# Altium PCB PCB1.PcbDoc
Units mm, origin at the board's own origin, x right, y up, seen from the top; angles counter-clockwise.
Board outline 152.4 x 101.6 mm, 3 copper layers (Top Layer, outline, Bottom Layer), stack 0.488 mm thick; 65 components, 56 nets, 223 pads, 0 vias.
Unrouted connection lines stored in the file: 8.
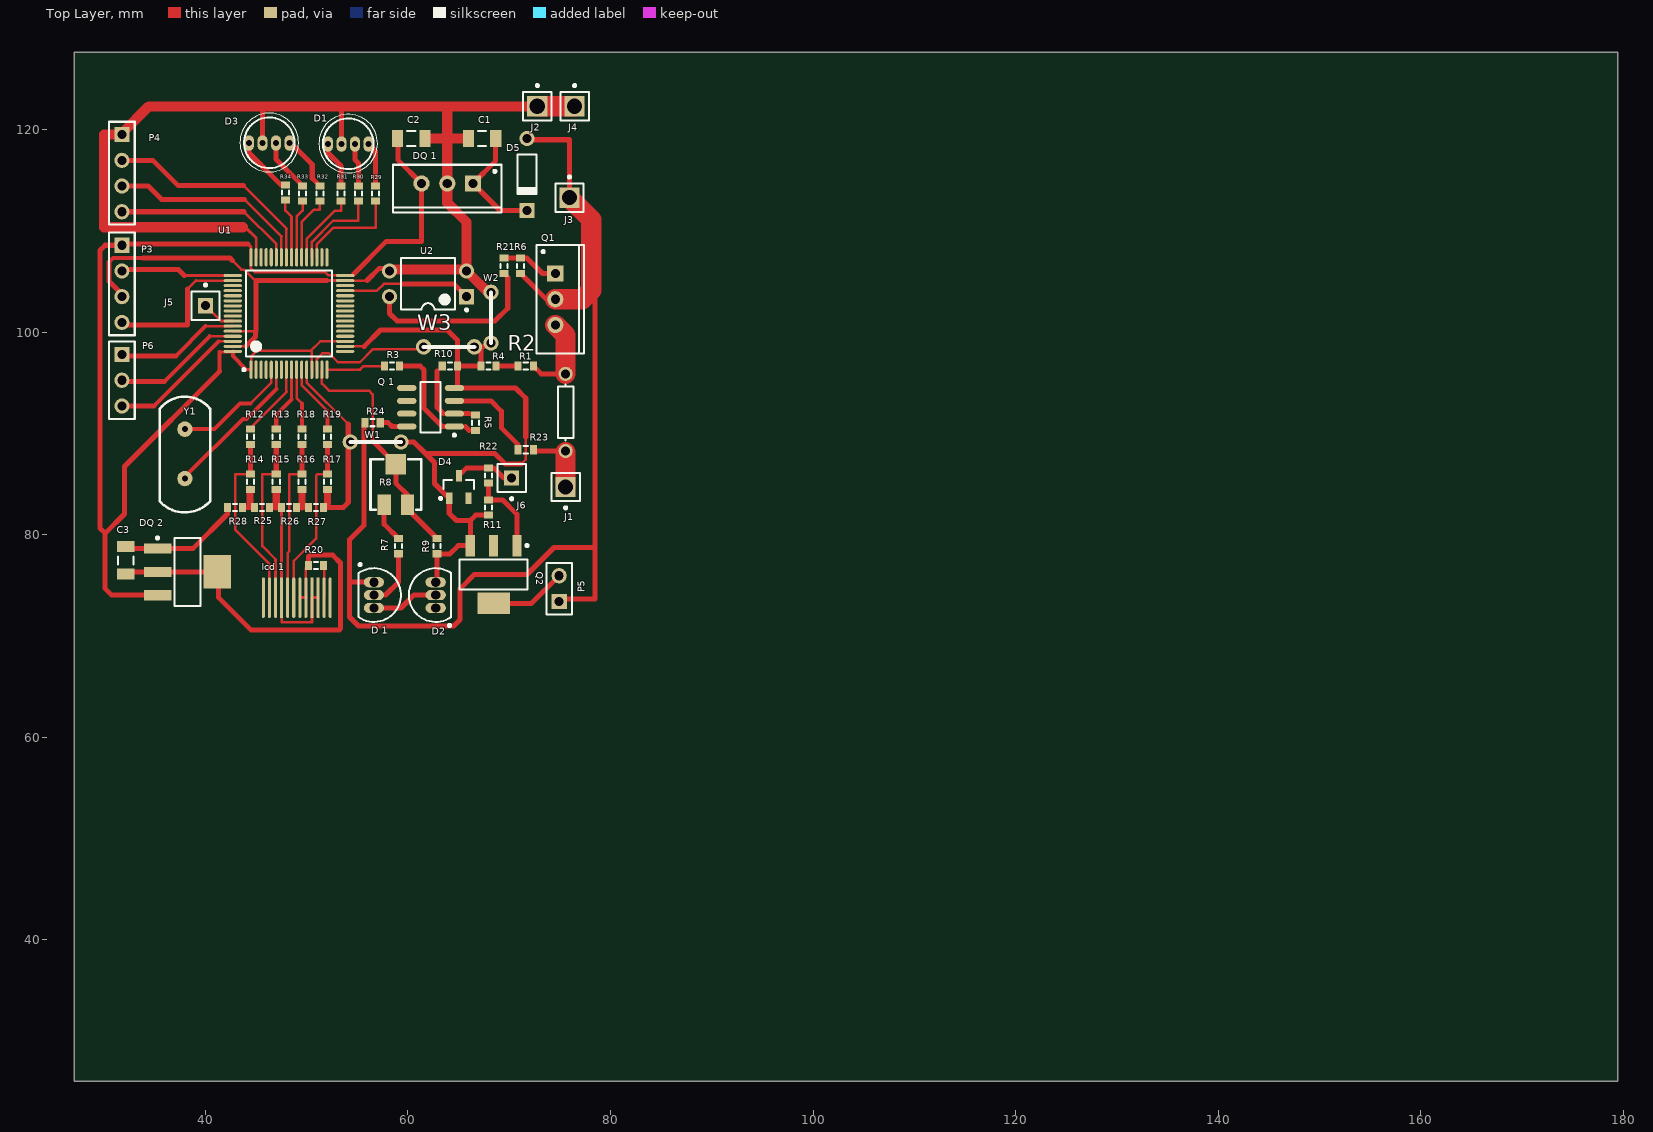
[diagram p0: Top Layer view]
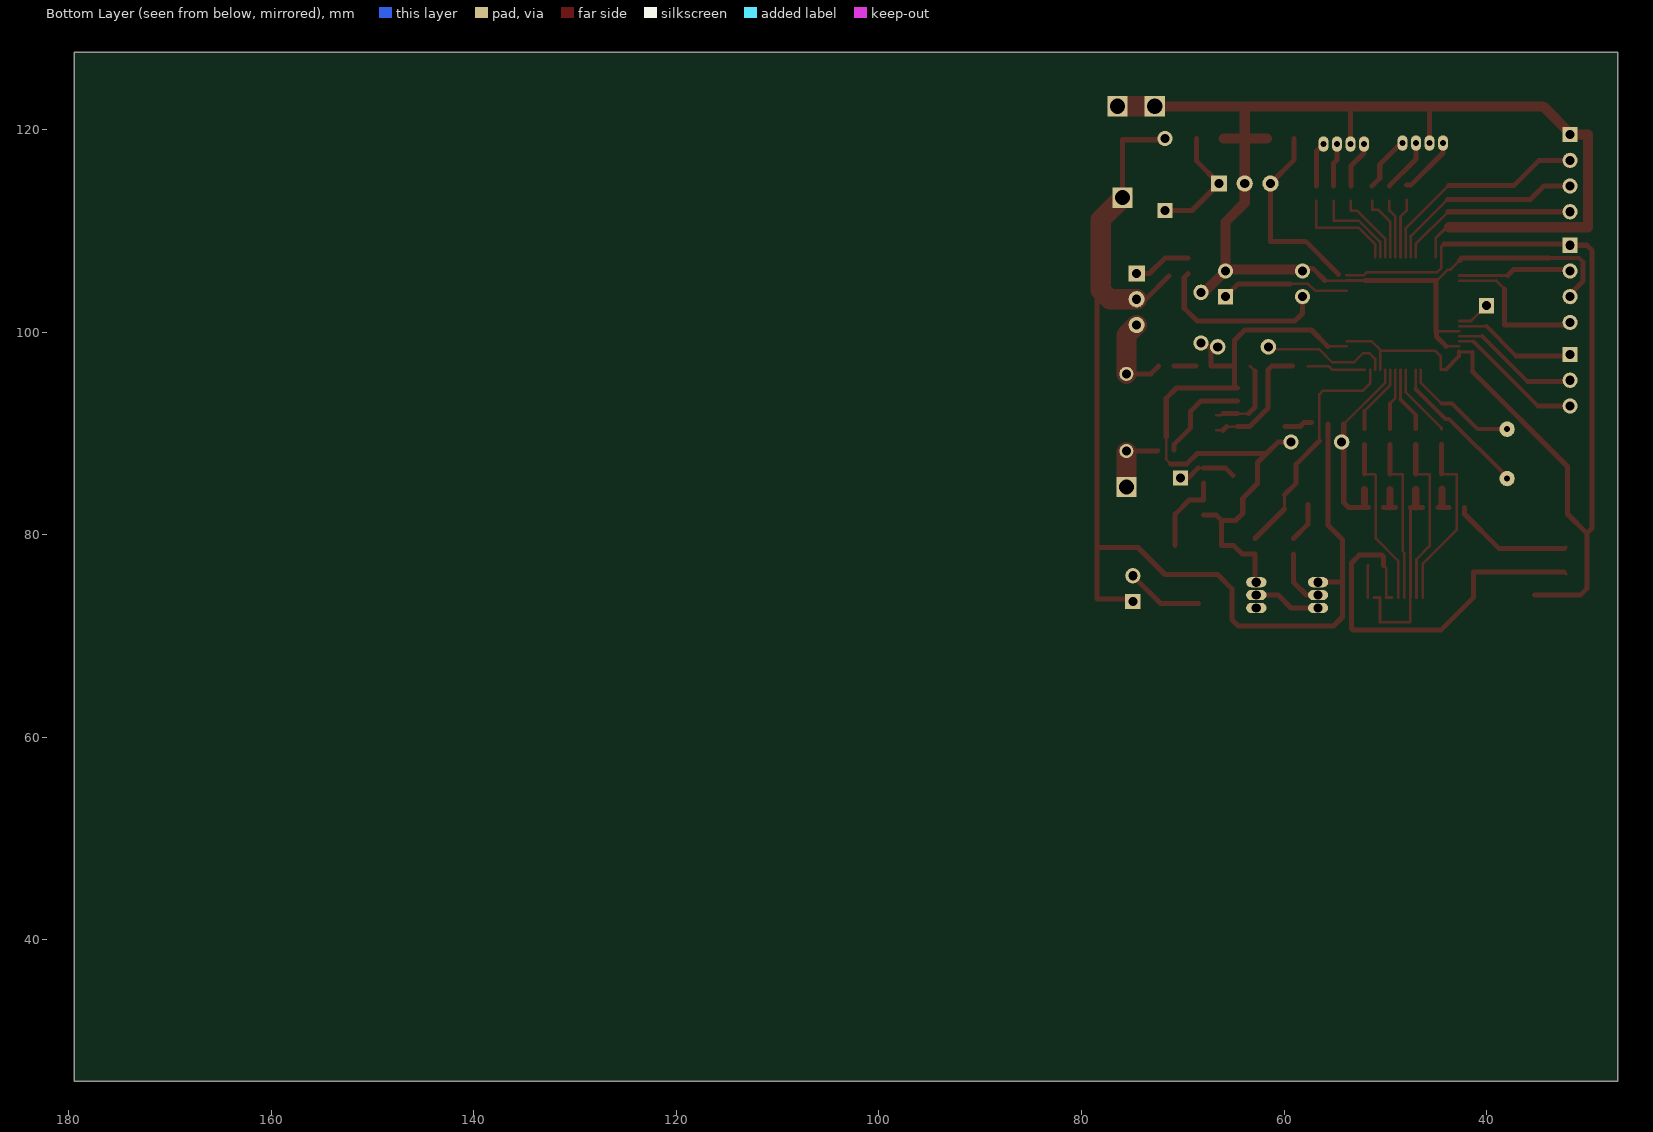
[diagram p1: Bottom Layer view, seen from below]

## Layer stack, top to bottom
Top Solder: solder mask 0.0102, Solder Resist, Dk 3.5
Top Layer: signal copper 0.0356
Dielectric 1: core 0.254, FR-4, Dk 4.2
outline: signal copper 0.036
Dielectric 2: prepreg 0.127, Dk 4.2
Bottom Layer: signal copper 0.0356
Bottom Solder: solder mask 0.0102, Solder Resist, Dk 3.5

## Board outline
27.051,26.035 179.451,26.035 179.451,127.635 27.051,127.635

## Design rules (kind name [scope] priority, off if disabled: settings)
Clearance [All] p1: gap=0.254
PolygonConnect [All] p1: connectstyle=Relief reliefconductorwidth=0.254 reliefentries=4 polygonreliefangle="90 Angle" airgapwidth=0.254
RoomDefinition "V_A meter" [InComponentClass('V_A meter')] p1: confinementstyle=ConfineIn formatcopy=TRUE lockcomponents=FALSE outline 0,0 50.8,0 50.8,25.4 0,25.4
RoomDefinition MK [InComponentClass('MK')] p2: confinementstyle=ConfineIn formatcopy=TRUE lockcomponents=FALSE outline 0,0 50.8,0 50.8,25.4 0,25.4
RoomDefinition display [InComponentClass('display')] p3: confinementstyle=ConfineIn formatcopy=TRUE lockcomponents=FALSE outline 0,0 50.8,0 50.8,25.4 0,25.4
RoomDefinition Designator [InComponentClass('Designator')] p4: confinementstyle=ConfineIn formatcopy=TRUE lockcomponents=FALSE outline 0,0 50.8,0 50.8,25.4 0,25.4
RoomDefinition 3 [InComponentClass('3')] p5: confinementstyle=ConfineIn formatcopy=TRUE lockcomponents=FALSE outline 0,0 50.8,0 50.8,25.4 0,25.4
RoomDefinition 2 [InComponentClass('2')] p6: confinementstyle=ConfineIn formatcopy=TRUE lockcomponents=FALSE outline 0,0 50.8,0 50.8,25.4 0,25.4
RoutingVias [All] p1: holewidth=0.711 width=1.27 viastyle="Through Hole" minholewidth=0.711 minwidth=1.27 maxholewidth=0.711 maxwidth=1.27
SolderMaskExpansion [All] p1: expansion=0.102
Width [All] p1: maxlimit=0.254 minlimit=0.254 preferedwidth=0.254
29 further rules are at their usual default settings.

## Classes and differential pairs
component class Designator: D4 P5 Q2 R11 R22 W1
component class 2: Q1 R6 R21 U2 W2
component class 3: D2 "D 1" R7 R8 R9
component class MK: C1 C2 D1 D3 D5 "DQ 1" J1 J2 J3 J4 J5 J6 P3 P4 P6 R29 R30 R31 R32 R33 R34 W3 Y1
component class display: C3 "DQ 2" "lcd 1" R12 R13 R14 R15 R16 R17 R18 R19 R20 R25 R26 R27 R28
component class "V_A meter": "Q 1" R1 R2 R3 R4 R5 R10 R23 R24

## Components (designator, comment, footprint, x,y, rotation, side; value= is the part's Value field where it differs from the comment)
C1 "Cap Semi" C1206 67.31,119.126 r180 top
C2 "Cap Semi" C1206 60.325,119.126 r180 top
C3 "Cap Semi" C1206 32.131,77.47 r90 top
D1 "LED1" PCBComponent_1#1 52.1,118.6 r0 top
D2 "LM335" TO-226-AE 62.738,74.041 r0 top
D3 "LED1" PCBComponent_1#1 44.3,118.7 r0 top
D4 "BZX84-C5V1" SOT-23_N 65.024,84.709 r90 top
D5 "Diode 1N4448" DO-35 71.755,115.57 r270 top
"D 1" "LM334" TO-226-AE 56.642,74.041 r180 top
"DQ 1" "lm7805" TO-220AB 63.881,114.681 r180 top
"DQ 2" "lm117" sot223_m 38.227,76.327 r0 top
J1 "Socket" PIN1#1 75.565,84.709 r180 top
J2 "Socket" PIN1#1 72.771,122.301 r0 top
J3 "Socket" PIN1#1 75.946,113.284 r0 top
J4 "Socket" PIN1#1 76.454,122.301 r0 top
J5 "Socket" PIN1#2 40.005,102.616 r0 top
J6 "Socket" PIN1#2 70.231,85.598 r180 top
"lcd 1" "Component_1" LCD 45.72,73.787 r0 top
P3 "PROG" HDR1X4 31.75,108.585 r270 top
P4 "NKODER" HDR1X4 31.75,119.507 r270 top
P5 "Header 2" HDR1X2 74.93,73.406 r90 top
P6 "Header 3" HDR1X3 31.75,97.79 r270 top
Q1 "MOSFET-P" TO-220AB 74.549,103.251 r270 top
Q2 "IRFL4105" sot223_l 68.453,76.073 r270 top
"Q 1" "LM258" SO8_L 62.23,92.583 r180 top
R1 "Res3" J1-0603 71.628,96.647 r0 top
R2 "Res1" AXIAL-0.3 75.565,92.075 r90 top
R3 "Res3" J1-0603 58.42,96.647 r180 top
R4 "Res3" J1-0603 67.945,96.647 r180 top
R5 "Res3" J1-0603 66.675,91.059 r270 top
R6 "Res3" J1-0603 71.12,106.553 r270 top
R7 "Res3" J1-0603 59.055,78.867 r90 top
R8 "RPot SM" POT4MM-2 58.801,84.963 r90 top
R9 "Res3" J1-0603 62.865,78.867 r270 top
R10 "Res3" J1-0603 64.135,96.647 r180 top
R11 "Res3" J1-0603 67.945,82.677 r90 top
R12 "Res3" J1-0603 44.45,89.674 r90 top
R13 "Res3" J1-0603 46.99,89.674 r90 top
R14 "Res3" J1-0603 44.45,85.229 r270 top
R15 "Res3" J1-0603 46.99,85.229 r270 top
R16 "Res3" J1-0603 49.53,85.229 r270 top
R17 "Res3" J1-0603 52.07,85.229 r270 top
R18 "Res3" J1-0603 49.53,89.674 r270 top
R19 "Res3" J1-0603 52.07,89.674 r270 top
R20 "Res3" J1-0603 50.927,76.962 r180 top
R21 "Res3" J1-0603 69.469,106.553 r270 top
R22 "Res3" J1-0603 67.945,85.852 r270 top
R23 "Res3" J1-0603 71.628,88.392 r180 top
R24 "Res3" J1-0603 56.515,91.059 r0 top
R25 "Res3" J1-0603 45.593,82.689 r0 top
R26 "Res3" J1-0603 48.26,82.689 r180 top
R27 "Res3" J1-0603 50.927,82.689 r180 top
R28 "Res3" J1-0603 42.926,82.677 r180 top
R29 "Res3" J1-0603 56.8,113.7 r90 top
R30 "Res3" J1-0603 55.1,113.7 r90 top
R31 "Res3" J1-0603 53.4,113.7 r90 top
R32 "Res3" J1-0603 51.3,113.7 r90 top
R33 "Res3" J1-0603 49.6,113.7 r90 top
R34 "Res3" J1-0603 47.9,113.8 r90 top
U1 "STM32F100R6T6" STM-LQFP64_N 48.25,101.845 r90 top
U2 "Optoisolator1" DIP-4 61.976,104.775 r180 top
W1 "Jumper" PCBComponent_1#2 59.309,89.154 r180 top
W2 "Jumper" PCBComponent_1#2 68.199,98.933 r90 top
W3 "Jumper" PCBComponent_1#2 66.548,98.552 r180 top
Y1 "XTAL" PCBComponent_1#3 37.973,90.424 r270 top

## Footprints (in the part's own frame and the unit in brackets; to place one, negate y for a bottom-side part, rotate by r counter-clockwise, add the part's x,y. Pads: shape width x height; smd on the part's side, far side on the other; paste and mask are expansions set on the pad)
AXIAL-0.3 [mm] "Axial Device, Thru-Hole; 2 Leads; 0.3 in Pin Spacing"
  round 1.4 hole 0.9: 1(-3.81,0) 2(3.81,0)
  silkscreen extent -2.77,-0.76 2.77,0.76
C1206 [mm] "Chip Capacitor, Body 3.2x1.6mm, IPC High Density"
  rect 1.1x1.7 smd: 1(-1.35,0) 2(1.35,0)
  silkscreen extent -0.4,-0.75 0.4,0.75, body extent -1.7,-0.9 1.7,0.9, height 1.3
DIP-4 [mm] "DIP; 4 Leads; Row Spacing 7.62 mm; Pitch 2.54 mm"
  rect 1.5x1.5 hole 0.9: 1(-3.81,1.27)
  round 1.5 hole 0.9: 2(-3.81,-1.27) 3(3.81,-1.27) 4(3.81,1.27)
  silkscreen extent -3.94,-2.55 2.65,2.69, body extent -3.15,-2.5 3.15,2.5, height 5.6
DO-35 [mm] "Diode, Axial; Body 3.8 x 1.9 mm (LxDia. max), Lead Dia. 0.53 mm (max)"
  round 1.5 hole 0.9: 1(-3.55,0)
  rect 1.5x1.5 hole 0.9: 2(3.55,0)
  silkscreen extent -1.95,-0.95 2.05,0.95
HDR1X2 [mm] "Connector; Header; 2 Position"
  rect 1.5x1.5 hole 0.9: 1(0,0)
  round 1.5 hole 0.9: 2(2.54,0)
  silkscreen extent -1.27,-1.27 3.81,1.27
HDR1X3 [mm] "Connector; Header; 3 Position"
  rect 1.5x1.5 hole 0.9: 1(0,0)
  round 1.5 hole 0.9: 2(2.54,0) 3(5.08,0)
  silkscreen extent -1.27,-1.27 6.35,1.27
HDR1X4 [mm] "Connector; Header; 4 Position"
  rect 1.5x1.5 hole 0.9: 1(0,0)
  round 1.5 hole 0.9: 2(2.54,0) 3(5.08,0) 4(7.62,0)
  silkscreen extent -1.27,-1.27 8.89,1.27
J1-0603 [mm] "Chip Resistor, Body 1.6x0.8mm, IPC High Density"
  rect 0.7x0.9 smd: 1(-0.75,0) 2(0.75,0)
  silkscreen extent -0.2,-0.35 0.2,0.35, body extent -0.85,-0.48 0.85,0.48, height 0.9
LCD [mm]
  oval 0.3x4 smd: A1(0,0) A2(0.6,0) A3(1.2,0) A5(2.4,0) A6(3,0) A7(3.6,0) A8(4.2,0) A11(6,0) A12(6.6,0)
  rect 0.3x4 smd: A4(1.8,0) A9(4.8,0)
  rrect50% 0.3x4 smd: A10(5.4,0)
PCBComponent_1#1 [mm]
  oval 1x1.524 hole 0.6: 1(0,-0.025) 2(1.333,-0.025) 3(2.667,-0.025) 4(4,-0.025)
  silkscreen extent -0.9,-2.87 4.9,2.92
PCBComponent_1#2 [mm]
  round 1.524 hole 0.9: 1(0,0) 2(5,0)
  silkscreen extent 0,0 5,0
PCBComponent_1#3 [mm]
  round 1.524 hole 0.6: 1(0,0) 2(4.88,0)
  silkscreen extent -3.2,-2.5 8.23,2.5
PIN1#1 [mm] "Connector; Plug"
  rect 2x2 hole 1.5: 1(0,0)
  silkscreen extent -1.4,-1.4 1.4,2.17
PIN1#2 [mm] "Connector; Plug"
  rect 1.5x1.5 hole 0.9: 1(0,0)
  silkscreen extent -1.4,-1.4 1.4,2.17
POT4MM-2 [mm] "Square Trimming Potentiometer"
  rect 2x1.3 smd: CCW(-2,-1.15) CW(-2,1.15)
  rect 2x2 smd: W(2,0)
  silkscreen extent -2.5,-2.5 2.5,2.5
SO8_L [mm] "SOIC, 8-Leads, Body 4.9x3.9mm, Pitch 1.27mm, IPC High Density"
  oval 1.9x0.6 smd: 1(-2.35,1.905) 2(-2.35,0.635) 3(-2.35,-0.635) 4(-2.35,-1.905) 5(2.35,-1.905) 6(2.35,-0.635) 7(2.35,0.635) 8(2.35,1.905)
  silkscreen extent -2.48,-2.5 1,2.88, body extent -2,-2.5 2,2.5, height 1.75
sot223_l [mm] "SOT223, 4-Leads, Body 6.5x3.5mm, Pitch 2.3mm, Lead Span 7mm, IPC High Density"
  rect 2.1x0.9 smd: 1(-2.85,2.3) 2(-2.85,0) 3(-2.85,-2.3)
  rect 2.1x3.2 smd: 4(2.85,0)
  silkscreen extent -2.97,-3.35 1.5,3.43, body extent -1.85,-3.35 1.85,3.35, height 1.7
sot223_m [mm] "SOT223, 4-Leads, Body 6.5x3.5mm, Pitch 2.3mm, Lead Span 7mm, IPC Low Density"
  rect 2.7x1 smd: 1(-2.95,2.3) 2(-2.95,0) 3(-2.95,-2.3)
  rect 2.7x3.3 smd: 4(2.95,0)
  silkscreen extent -3.07,-3.35 1.3,3.47, body extent -1.85,-3.35 1.85,3.35, height 1.7
SOT-23_N [mm] "SOT23, 3-Leads, Body 2.9x1.3mm, Pitch 0.95mm, Lead Span 2.5mm, IPC Medium Density"
  rect 1.15x0.6 smd: 1(-1.125,0.95) 2(-1.125,-0.95) 3(1.125,0)
  silkscreen extent -1.25,-1.5 0.7,1.92, body extent -0.7,-1.5 0.7,1.5, height 1.1
STM-LQFP64_N [mm] "Thin QFP, 64-Leads, Body 10x10mm, Pitch 0.5mm, IPC Medium Density"
  oval 1.8x0.3 smd: 1(-5.55,3.75) 2(-5.55,3.25) 3(-5.55,2.75) 4(-5.55,2.25) 5(-5.55,1.75) 6(-5.55,1.25) 7(-5.55,0.75) 8(-5.55,0.25) 9(-5.55,-0.25) 10(-5.55,-0.75) 11(-5.55,-1.25) 12(-5.55,-1.75) 13(-5.55,-2.25) 14(-5.55,-2.75) 15(-5.55,-3.25) 16(-5.55,-3.75) 33(5.55,-3.75) 34(5.55,-3.25) 35(5.55,-2.75) 36(5.55,-2.25) 37(5.55,-1.75) 38(5.55,-1.25) 39(5.55,-0.75) 40(5.55,-0.25) 41(5.55,0.25) 42(5.55,0.75) 43(5.55,1.25) 44(5.55,1.75) 45(5.55,2.25) 46(5.55,2.75) 47(5.55,3.25) 48(5.55,3.75)
  oval 0.3x1.8 smd: 17(-3.75,-5.55) 18(-3.25,-5.55) 19(-2.75,-5.55) 20(-2.25,-5.55) 21(-1.75,-5.55) 22(-1.25,-5.55) 23(-0.75,-5.55) 24(-0.25,-5.55) 25(0.25,-5.55) 26(0.75,-5.55) 27(1.25,-5.55) 28(1.75,-5.55) 29(2.25,-5.55) 30(2.75,-5.55) 31(3.25,-5.55) 32(3.75,-5.55) 49(3.75,5.55) 50(3.25,5.55) 51(2.75,5.55) 52(2.25,5.55) 53(1.75,5.55) 54(1.25,5.55) 55(0.75,5.55) 56(0.25,5.55) 57(-0.25,5.55) 58(-0.75,5.55) 59(-1.25,5.55) 60(-1.75,5.55) 61(-2.25,5.55) 62(-2.75,5.55) 63(-3.25,5.55) 64(-3.75,5.55)
  silkscreen extent -5.67,-4.25 4.25,4.57, body extent -5,-5 5,5, height 1.6
TO-220AB [mm] "TO, Thru-Hole, Vertical, Heatsink Mounted; 3 In-Line Leads; Pitch 2.54 mm"
  rect 1.6x1.6 hole 0.9: 1(-2.54,0)
  round 1.6 hole 0.9: 2(0,0) 3(2.54,0)
  silkscreen extent -5.35,-1.85 5.35,2.85, body extent -5.4,-1.9 5.4,2.9, height 19.3
TO-226-AE [mm] "TO, Flat Index; 3 In-Line, Axial Leads; Body Dia. 4.8mm; Leads 0.55 x 0.51 mm (max)"
  oval 2x1 hole 0.9: 1(0,-1.27) 2(0,0) 3(0,1.27)
  silkscreen extent -2.65,-3.13 1.52,2.65, body extent -2.66,-2.66 1.52,2.66, height 7.87

## Part data
C1 C2 C3: "Capacitor (Semiconductor SIM Model)"
D1 D3: "Typical RED GaAs LED"
D4: library part "Diode BAS70", "Silicon AF Schottky Diode for High-Speed Switching"
D5: "High Conductance Fast Diode"
P3 P4: library part "Header 4", "Header, 4-Pin"
P5: "Header, 2-Pin"
P6: "Header, 3-Pin"
Q1: "P-Channel MOSFET"
Q2: library part MOSFET-N4, "N-Channel MOSFET, Externally Terminated Substrate"
"Q 1": library part LM258d
R1 R2 R3 R4 R5 R6 R7 R9 R10 R11 R12 R13 R14 R15 R16 R17 R18 R19 R20 R21 R22 R23 R24 R25 R26 R27 R28 R29 R30 R31 R32 R33 R34: "Resistor"
R8: "Square Trimming Potentiometer"
U1: "ARM Cortex-M3 32-bit MCU, 32 KB Flash, 4 KB Internal RAM, 51 I/Os, 64-pin LQFP, -40 to 85 degC, Tray"
U2: "4-Pin Phototransistor Optocoupler"
W1 W2 W3: "Jumper Wire"
Y1: "Crystal Oscillator"

## Nets (pads, with @x,y where several pads share a name; then routed paths per layer and width w, separated by ;. In a path a pad name is that pad's centre, name@x,y a point inside that pad or via, vN(x,y) a via of type N, cw(c..) or ccw(c..) an arc to the next point about the centre after c; other vN are vias at no path point)
"AKB OUT": Q1.3 R1.2 R2.2 | length 8.7
  Top Layer w0.5: R1.2@72.39,96.647 73.152,95.885 R2.2
  Top Layer w2: Q1.3 75.565,99.695 R2.2
GND: "DQ 1.2" "DQ 2.1" "Q 1.2" "Q 1.4" C1.2 C2.1 C3.2 D1.2 D2.3 D3.2 D4.1 J2.1 J4.1 P3.3 P4.1 Q2.3 R4.2 R5.1 R9.2 R10.1 R10.2 R11.1 R17.2 R27.1 R28.2 U1.12 U1.18 U1.31 U1.47 U1.60 U1.63 U2.2 U2.3 W1.1 W1.2 W2.1 W2.2 | length 267.2
  Top Layer w0.254: P3.3 P3.3@31.75,103.759 ; C3.2 C3.2@32.324,78.627 ; 42.672,107.061 43.561,106.172 43.815,106.172 44.883,105.104 45.01,105.104 ; U1.63@42.71,98.604 43.994,98.604 ; U1.60@42.71,100.104 44.958,100.104 ; 43.688,110.363 43.942,110.363 ; 44.386,122.11 44.577,122.301 44.482,122.206 ; U1.47 45,109.285 45.01,109.295 ; 45.6,122.301 45.633,122.268 ; U1.12 50,95.034 54.102,90.932 ; R27.1 52.07,83.082 ; 52.018,105.104 U1.31@53.81,105.104 ; U1.18 55.671,98.595 ; U1.31 55.946,105.095 55.955,105.104 ; U2.3@57.912,106.299 U2.3@58.166,106.172 ; D2.3@62.738,75.438 D2.3@62.865,75.565 ; 62.865,96.139 R10.2@63.373,96.647 ; 63.5,91.948 64.58,91.948 ; 66.04,91.948 66.179,91.809 R5.1 ; W2.1@67.818,98.933 W2.1 W2.1@68.453,99.187 ; 71.209,86.995 71.628,87.414 71.628,89.662 ; J2.1@72.517,122.809 J2.1@72.771,122.555
  Top Layer w0.3: 43.942,110.363 45.01,109.295
  Top Layer w0.4: 30.48,106.934 30.861,107.315 33.846,107.315
  Top Layer w0.5: 30.48,106.934 30.48,105.029 P3.3@31.75,103.759 ; C3.2@32.324,78.627 35.277,78.627 38.749,78.627 42.176,82.054 R28.2 ; 33.846,107.315 42.418,107.315 42.672,107.061 ; 43.994,98.604 44.958,99.568 44.958,100.104 ; 45.01,100.076 45.01,105.104 52.018,105.104 ; D3.2 45.633,122.268 ; R27.1 53.606,82.689 54.102,83.185 54.102,90.932 ; D1.2 53.433,122.268 ; 55.68,98.604 57.279,100.203 63.881,100.203 64.885,99.199 R10.1 ; 55.955,105.104 57.15,106.299 U2.3@57.912,106.299 ; W1.1 60.579,89.154 61.722,88.011 ; D2.3@62.865,75.565 R9.2 64.147,78.117 64.953,78.923 Q2.3 66.153,81.393 ; 62.865,96.139 62.865,92.583 63.5,91.948 ; 64.58,91.948 66.04,91.948 ; 64.58,94.488 70.612,94.488 71.628,93.472 71.628,89.662 ; 64.885,94.793 R10.1 ; W2.1@67.818,98.933 67.195,98.31 R4.2 R10.1 ; R11.1 66.687,81.927 66.153,81.393 ; 71.209,86.995 69.596,86.995 68.58,88.011 61.722,88.011 ; 61.722,88.011 62.611,87.122 62.611,85.047 D4.1 64.074,82.103 64.784,81.393 66.153,81.393
  Top Layer w0.7: 52.07,83.082 R17.2
  Top Layer w1: P4.1@31.686,119.57 34.417,122.301 44.577,122.301 45.6,122.301 J2.1 ; P4.1 29.972,119.507 29.972,110.363 43.688,110.363 ; U2.3@58.166,106.172 65.786,106.172 65.786,110.871 63.881,112.776 63.881,114.681 63.881,119.126 ; C2.1 63.881,119.126 ; 63.881,122.174 63.881,119.126 ; U2.2 W2.2@68.199,103.632 ; C1.2 63.881,119.126
  Top Layer w2: J2.1 J4.1
"LED B 1": R31.1 U1.37 | length 7.3
  Top Layer w0.254: U1.37 50,109.2 52.8,112 53.4,112 R31.1
"LED B 2": R34.1 U1.40 | length 5.9
  Top Layer w0.254: R34.1 47.9,112 48.5,111.4 U1.40
"LED G 1": R30.1 U1.36 | length 8.9
  Top Layer w0.254: U1.36 50.5,108.9 52.6,111 55.1,111 R30.1
"LED G 2": R33.1 U1.39 | length 5.8
  Top Layer w0.254: U1.39 49,111.4 49.6,112 R33.1
"LED R 1": R29.1 U1.35 | length 10.4
  Top Layer w0.254: U1.35 U1.35@51,107.414 ; U1.35@51.01,107.404 U1.35@51,107.414 ; R29.1 56.8,110.3 52.6,110.3 51,108.7 U1.35@51,107.414
"LED R 2": R32.1 U1.38 | length 6.7
  Top Layer w0.254: U1.38 49.5,110.9 50.7,112.1 51.3,112.1 R32.1
NetC1_1: "DQ 1.1" C1.1 D5.2 | length 11.8
  Top Layer w0.5: C1.1 68.66,116.92 66.421,114.681 69.088,112.014 D5.2@71.749,112.014
NetC3_1: "DQ 2.2" "DQ 2.4" "lcd 1.A7" "lcd 1.A8" C3.1 R20.2 | length 39.9
  Top Layer w0.254: C3.1 C3.1@32.338,76.327 ; 49.92,73.787 49.92,76.705 R20.2 ; 53.213,70.612 53.34,70.739
  Top Layer w0.3: 49.32,73.787 49.92,73.787
  Top Layer w0.5: C3.1@32.338,76.327 35.277,76.327 41.177,76.327 ; 41.275,76.327 41.275,73.816 44.479,70.612 53.213,70.612 ; R20.2 50.177,77.839 50.316,77.978 52.578,77.978 53.34,77.216 53.34,70.739
NetD1_1: D1.1 R31.2 | length 4.7
  Top Layer w0.5: D1.1 52.1,117.7 53.4,116.4 R31.2
NetD1_3: D1.3 R30.2 | length 4.3
  Top Layer w0.5: D1.3 54.767,117.033 55.1,116.7 R30.2
NetD1_4: D1.4 R29.2 | length 4.4
  Top Layer w0.5: D1.4 56.8,117.875 R29.2
NetD3_1: D3.1 R34.2 | length 5.9
  Top Layer w0.5: D3.1 44.3,117.7 47.45,114.55 R34.2
NetD3_3: D3.3 R33.2 | length 5.3
  Top Layer w0.5: D3.3 46.967,117.083 R33.2
NetD3_4: D3.4 R32.2 | length 5.5
  Top Layer w0.5: D3.4 48.425,118.675 50.4,116.7 50.55,116.55 50.55,115.2 R32.2
NetD4_3: D4.3 J6.1 R22.1 | length 5.9
  Top Layer w0.254: R22.1 68.465,86.602
  Top Layer w0.5: D4.3 65.792,86.602 R22.1 ; 68.465,86.602 69.469,85.598 J6.1
"NetD 1_2": "D 1.2" R7.1 | length 5.7
  Top Layer w0.254: 56.642,74.041 57.785,74.041
  Top Layer w0.5: 57.785,74.041 59.055,75.311 R7.1
"NetD 1_3": "D 1.3" D2.2 | length 6.6
  Top Layer w0.5: 56.642,72.771 59.309,72.771 60.579,74.041 D2.2
NetJ1_1: J1.1 R2.1 R23.1 | length 6.7
  Top Layer w0.254: R23.1 R23.1@72.505,88.265
  Top Layer w0.5: R23.1@72.505,88.265 R2.1
  Top Layer w2: J1.1 R2.1@75.565,88.138
NetJ5_1: J5.1 U1.58 | length 3.9
  Top Layer w0.254: J5.1@39.751,103.124 39.751,102.87 41.517,101.104 U1.58@42.71,101.104
"Netlcd 1_A2": "lcd 1.A2" R12.1 R14.1 | length 18.1
  Top Layer w0.254: R14.1 42.926,85.979 42.926,80.518 46.32,77.124 46.32,73.787
  Top Layer w0.5: R14.1 R12.1
"Netlcd 1_A3": "lcd 1.A3" R13.1 R15.1 | length 17.1
  Top Layer w0.254: 46.92,73.787 46.92,77.578 45.612,78.886 45.612,85.979 R15.1
  Top Layer w0.5: R15.1 R13.1
"Netlcd 1_A4": "lcd 1.A4" "lcd 1.A9" "lcd 1.A10" R14.2 R15.2 R16.2 R25.1 R25.2 R26.1 R26.2 R27.2 R28.1 | length 26
  Top Layer w0.254: 47.51,73.797 R26.2 ; 47.52,73.787 47.52,71.348 50.52,71.348 50.52,73.787
  Top Layer w0.3: 50.52,73.787 51.12,73.787
  Top Layer w0.5: R28.1@43.688,82.689 R25.1@44.8,82.689 ; R25.2 R26.2 ; R15.2@46.925,84.414 R15.2 ; R26.1 49.53,82.689 ; R16.2 R16.2@49.6,84.409 ; 49.6,82.689 R27.2
  Top Layer w0.7: 44.4,82.875 R14.2@44.4,84.49 ; 46.99,82.754 R15.2 ; 49.53,82.759 R16.2
"Netlcd 1_A5": "lcd 1.A5" R16.1 R18.2 | length 16.5
  Top Layer w0.254: 48.12,73.787 48.12,78.195 48.275,78.35 48.275,85.979 R16.1 ; 48.275,83.943 48.279,83.947
  Top Layer w0.5: R16.1 R18.2
"Netlcd 1_A6": "lcd 1.A6" R17.1 R19.2 | length 17.1
  Top Layer w0.254: 48.72,73.787 48.72,77.422 50.927,79.629 50.927,85.852 51.054,85.979 R17.1
  Top Layer w0.5: R17.1 R19.2
"Netlcd 1_A11": "lcd 1.A11" R20.1 | length 3.2
  Top Layer w0.254: R20.1 51.72,76.919 51.72,73.787
NetP3_2: P3.2 U1.49 | length 11.2
  Top Layer w0.254: 37.915,105.595 U1.49
  Top Layer w0.5: P3.2@31.75,106.172 37.338,106.172 37.906,105.604
NetP3_4: P3.4 U1.50 | length 14.8
  Top Layer w0.254: 38.227,104.267 39.064,105.104 ; 39.073,105.095 U1.50
  Top Layer w0.5: P3.4@31.75,100.711 38.227,100.711 38.227,104.267
NetP4_2: P4.2 U1.41 | length 21.9
  Top Layer w0.254: 43.742,114.5 48.01,110.232 48,110.222 U1.41
  Top Layer w0.5: P4.2 34.808,116.967 37.275,114.5 43.742,114.5
NetP4_3: P4.3 U1.42 | length 19.9
  Top Layer w0.254: 43.872,113.1 47.51,109.462 47.5,109.452 U1.42
  Top Layer w0.5: P4.3 34.348,114.427 35.675,113.1 43.872,113.1
NetP4_4: P4.4 U1.43 | length 17.9
  Top Layer w0.254: 43.815,111.887 47.01,108.692 47,108.682 U1.43
  Top Layer w0.5: P4.4 43.815,111.887
NetP5_2: P5.2 Q2.2 Q2.4 | length 7.6
  Top Layer w0.5: Q2.4 72.207,73.223 P5.2
NetP6_1: P6.1 U1.59 | length 12.1
  Top Layer w0.254: P6.1@31.877,97.409 P6.1@32.131,97.663 ; 40.034,100.595 U1.59
  Top Layer w0.4: 37.084,97.663 40.025,100.604
  Top Layer w0.5: P6.1@32.131,97.663 37.084,97.663
NetP6_2: P6.2 U1.61 | length 12.8
  Top Layer w0.254: 40.413,99.595 U1.61 ; U1.61@42.707,99.601 U1.61@42.71,99.604
  Top Layer w0.4: 35.941,95.123 40.413,99.595
  Top Layer w0.5: P6.2@31.75,95.123 35.941,95.123
NetP6_3: P6.3 U1.62 | length 13.7
  Top Layer w0.254: P6.3@31.75,92.329 P6.3@32.131,92.71 ; 41.31,99.095 U1.62
  Top Layer w0.4: 34.925,92.71 41.275,99.06
  Top Layer w0.5: P6.3@32.131,92.71 34.925,92.71
NetQ1_1: Q1.1 R6.1 R21.1 | length 6.2
  Top Layer w0.254: R6.1 71.628,107.303
  Top Layer w0.5: R21.1 71.755,107.303 73.279,105.791 Q1.1
NetQ2_1: Q2.1 R11.2 R22.2 | length 8.2
  Top Layer w0.5: R22.2 R11.2 69.354,83.427 70.753,82.028 Q2.1
"NetQ 1_1": "Q 1.1" R3.1 R5.2 | length 12.4
  Top Layer w0.254: 64.58,90.678 65.659,90.678 ; 66.028,90.309 R5.2
  Top Layer w0.5: R3.1 61.214,96.647 61.595,96.266 61.595,92.456 63.373,90.678 64.58,90.678 ; 65.659,90.678 66.028,90.309
"NetQ 1_3": "Q 1.3" R23.2 | length 9.6
  Top Layer w0.5: 64.58,93.218 68.199,93.218 69.215,92.202 69.215,90.551 70.878,88.888 R23.2
"NetQ 1_8": "Q 1.8" R24.2 | length 2.8
  Top Layer w0.5: R24.2 58.039,91.059 58.42,90.678 59.88,90.678
NetR1_1: R1.1 R4.1 W3.1 | length 2.2
  Top Layer w0.5: R4.1 R1.1
NetR3_2: R3.2 U1.16 | length 5.8
  Top Layer w0.254: U1.16@52.041,96.304 55.283,96.304 55.626,96.647 R3.2
NetR7_2: R7.2 R8.CW | length 3.9
  Top Layer w0.5: R8.CW 57.651,81.021 R7.2
NetR8_CCW: R8.CCW R8.W R9.1 U1.15 | length 23.7
  Top Layer w0.254: U1.15 51.5,94.931 52.197,94.234 56.134,94.234 56.515,93.853 56.515,89.249 ; R8.CCW@59.951,82.531 R8.CCW R8.CCW@59.951,83.94
  Top Layer w0.5: 56.515,89.249 R8.W 58.801,85.09 R8.CCW@59.951,83.94 ; R8.CCW@59.951,82.531 R9.1
NetR12_2: R12.2 U1.8 | length 7.4
  Top Layer w0.254: R12.2 44.45,90.551 48.01,94.111 48,94.121 U1.8
NetR13_2: R13.2 U1.9 | length 6.5
  Top Layer w0.254: U1.9 48.5,93.351 48.51,93.341
  Top Layer w0.4: R13.2 46.99,91.821 48.51,93.341
NetR18_1: R18.1 U1.10 | length 6.1
  Top Layer w0.254: U1.10 49,93.494 49.53,92.964
  Top Layer w0.4: R18.1 49.53,92.964
NetR19_1: R19.1 U1.11 | length 6.9
  Top Layer w0.254: U1.11 49.5,94.772 52.07,92.202
  Top Layer w0.4: R19.1 52.07,92.202
NetR21_2: R21.2 U2.4 | length 18.4
  Top Layer w0.254: R21.2@69.342,105.791 69.85,105.283
  Top Layer w0.5: U2.4 58.166,101.854 58.928,101.092 68.58,101.092 69.85,102.362 69.85,105.283 ; R21.2@69.469,105.791 69.85,105.41
NetU1_5: U1.5 Y1.1 | length 11.7
  Top Layer w0.254: 44.45,92.964 46.51,95.024 46.5,95.034 U1.5
  Top Layer w0.4: Y1.1 40.894,90.424 43.434,92.964 44.45,92.964
NetU1_6: U1.6 Y1.2 | length 14.7
  Top Layer w0.254: Y1.2@37.973,85.598 Y1.2@37.973,85.725 ; 47,94.391 U1.6
  Top Layer w0.4: Y1.2@37.973,85.725 43.688,91.44 44.069,91.44 47.01,94.381
NetU1_14: U1.14 W3.2 | length 12.7
  Top Layer w0.254: U1.14@51.01,96.304 51.01,97.365 51.562,97.917 52.197,97.917 53.086,97.028 55.245,97.028 56.515,98.298 W3.2@61.548,98.298
NetU1_29: U1.29 U2.1 | length 12.8
  Top Layer w0.254: U1.29 56.935,104.095 57.614,104.775 59.436,104.775
  Top Layer w0.5: 59.436,104.775 64.516,104.775 U2.1
VCC: "D 1.1" D5.1 J3.1 P5.1 Q1.2 R6.2 R24.1 | length 113.7
  Top Layer w0.254: 73.66,103.251 Q1.2 ; 77.216,103.251 78.486,103.251
  Top Layer w0.5: 54.356,75.311 56.642,75.311 ; R24.1@55.638,90.932 55.638,80.911 54.229,79.502 54.229,71.882 55.118,70.993 64.516,70.993 65.151,71.628 65.151,74.676 66.548,76.073 71.755,76.073 74.422,78.74 78.486,78.74 ; R6.2@71.374,105.537 73.66,103.251 ; D5.1 71.876,118.999 75.946,118.999 J3.1 ; P5.1@75.184,73.66 78.486,73.66 78.486,78.74 ; 78.486,103.251 78.486,78.74
  Top Layer w2: Q1.2 77.216,103.251 78.105,104.14 78.105,111.125 J3.1
"VDD OUT": "DQ 1.3" "DQ 2.3" C2.2 P3.1 U1.1 U1.13 U1.19 U1.32 U1.48 U1.64 | length 125.1
  Top Layer w0.254: P3.1@31.623,108.839 P3.1@31.623,108.966 ; P3.1 P3.1@31.877,108.712 ; 41.402,98.044 U1.64@42.68,98.044 ; U1.64@42.71,98.104 U1.64@42.71,98.108 ; 44.479,108.429 44.479,106.308 44.869,105.918 51.816,105.918 52.13,105.604 U1.32@53.81,105.604 ; U1.1@44.51,96.312 44.51,97.596 45.085,98.171 50.419,98.171 51.352,99.104 U1.19@53.81,99.104 ; U1.13@50.51,96.304 50.51,98.08 ; U1.32@53.81,105.635 U1.32@53.828,105.617 ; C2.2 C2.2@59,119.101
  Top Layer w0.3: 44.023,96.312 U1.1@44.51,96.312 ; 44.196,108.712 44.479,108.429
  Top Layer w0.4: 41.402,96.139 41.402,98.044 ; U1.64@42.71,98.073 42.71,97.625 44.023,96.312
  Top Layer w0.5: P3.1 30.099,108.585 29.591,108.077 29.591,80.645 30.099,80.137 ; P3.1@31.877,108.712 44.196,108.712 ; 35.277,74.027 30.748,74.027 30.099,74.676 30.099,80.137 ; 41.402,96.139 32.004,86.741 32.004,82.042 30.099,80.137 ; U1.32@54.6,105.7 57.866,108.966 61.341,108.966 61.341,114.681 59,117.022 C2.2@59,119.101
pads on no net: "lcd 1.A1" "lcd 1.A12" "Q 1.5" "Q 1.6" "Q 1.7" D2.1 D4.2 U1.2 U1.3 U1.4 U1.7 U1.17 U1.20 U1.21 U1.22 U1.23 U1.24 U1.25 U1.26 U1.27 U1.28 U1.30 U1.33 U1.34 U1.44 U1.45 U1.46 U1.51 U1.52 U1.53 U1.54 U1.55 U1.56 U1.57

## Silkscreen, mask and mechanical layers (free items; w line width, h text height)
Mechanical 1:
  lines w0.406: 27.2,123.713 27.2,123.481 ; 27.2,123.481 27.2,123.806 28.928,125.534 78.247,125.534 80.95,122.832 80.95,70.767 77.848,67.665 31.832,67.665 27.2,72.297 27.2,123.481